# EAGLE board robit_simgosterge_v1 (EAGLE 6.5.0)
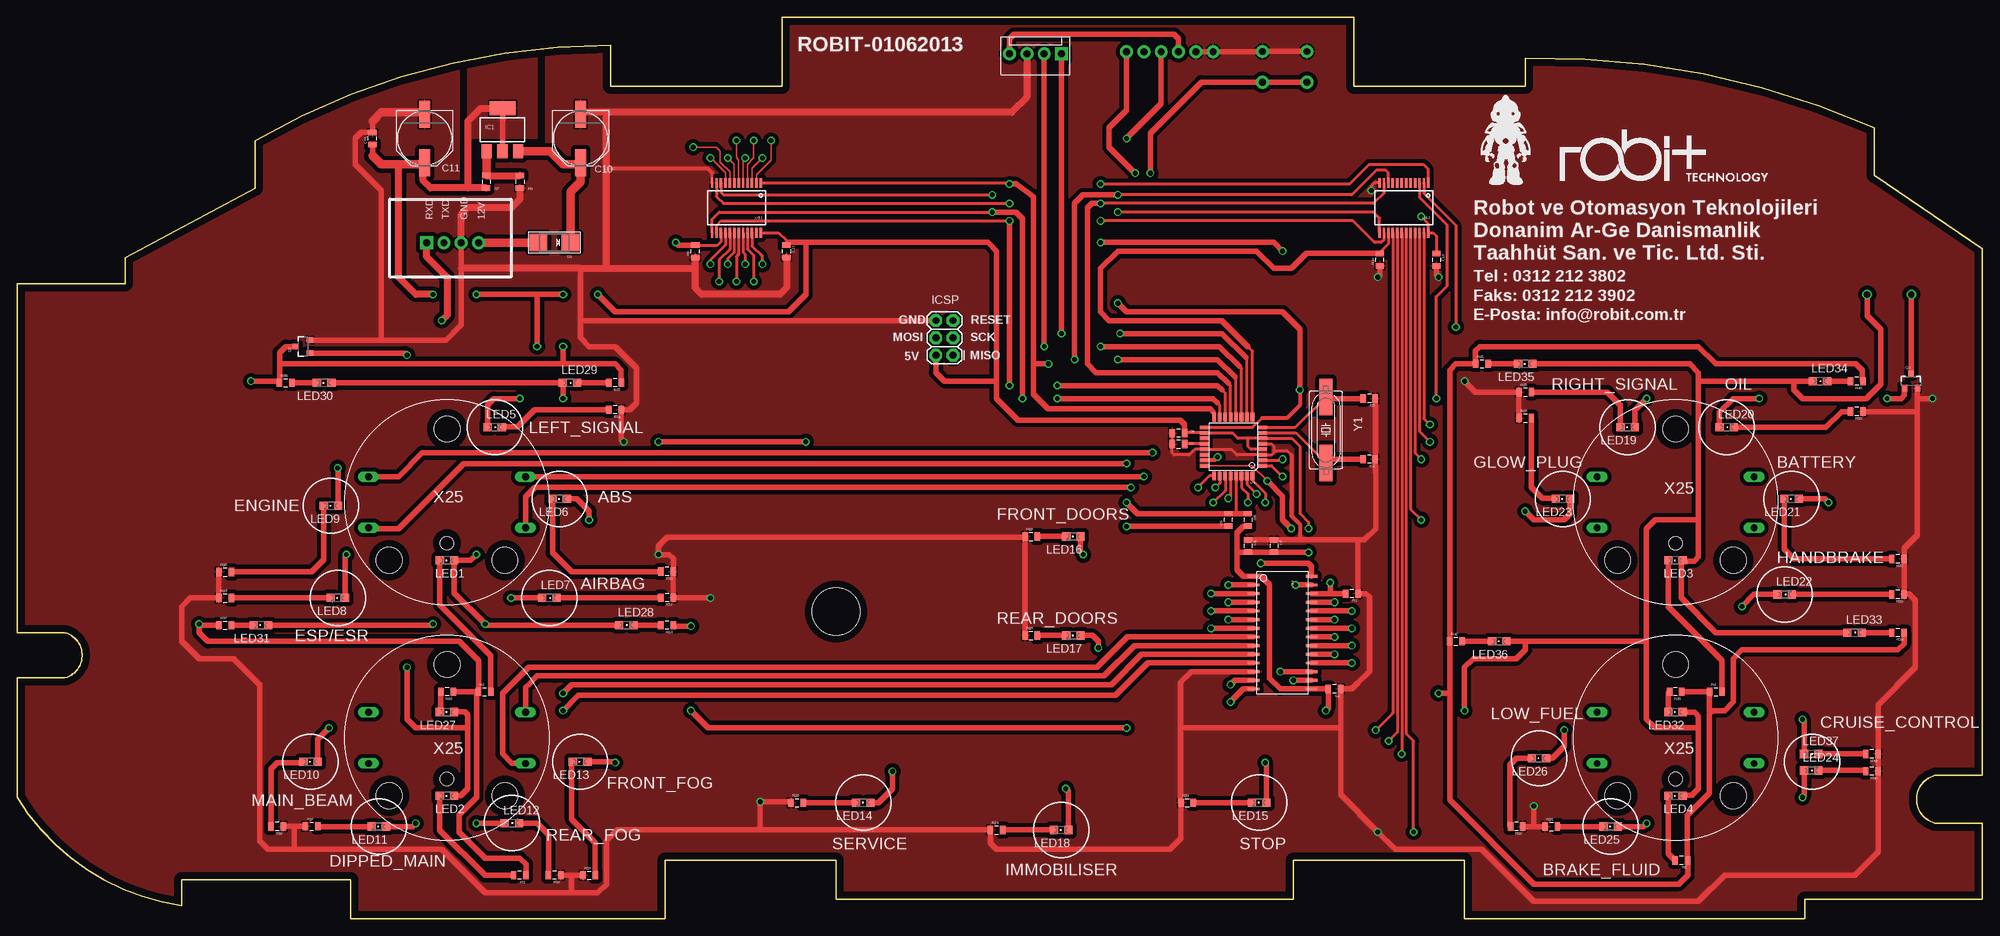
[diagram p0: board, top side]
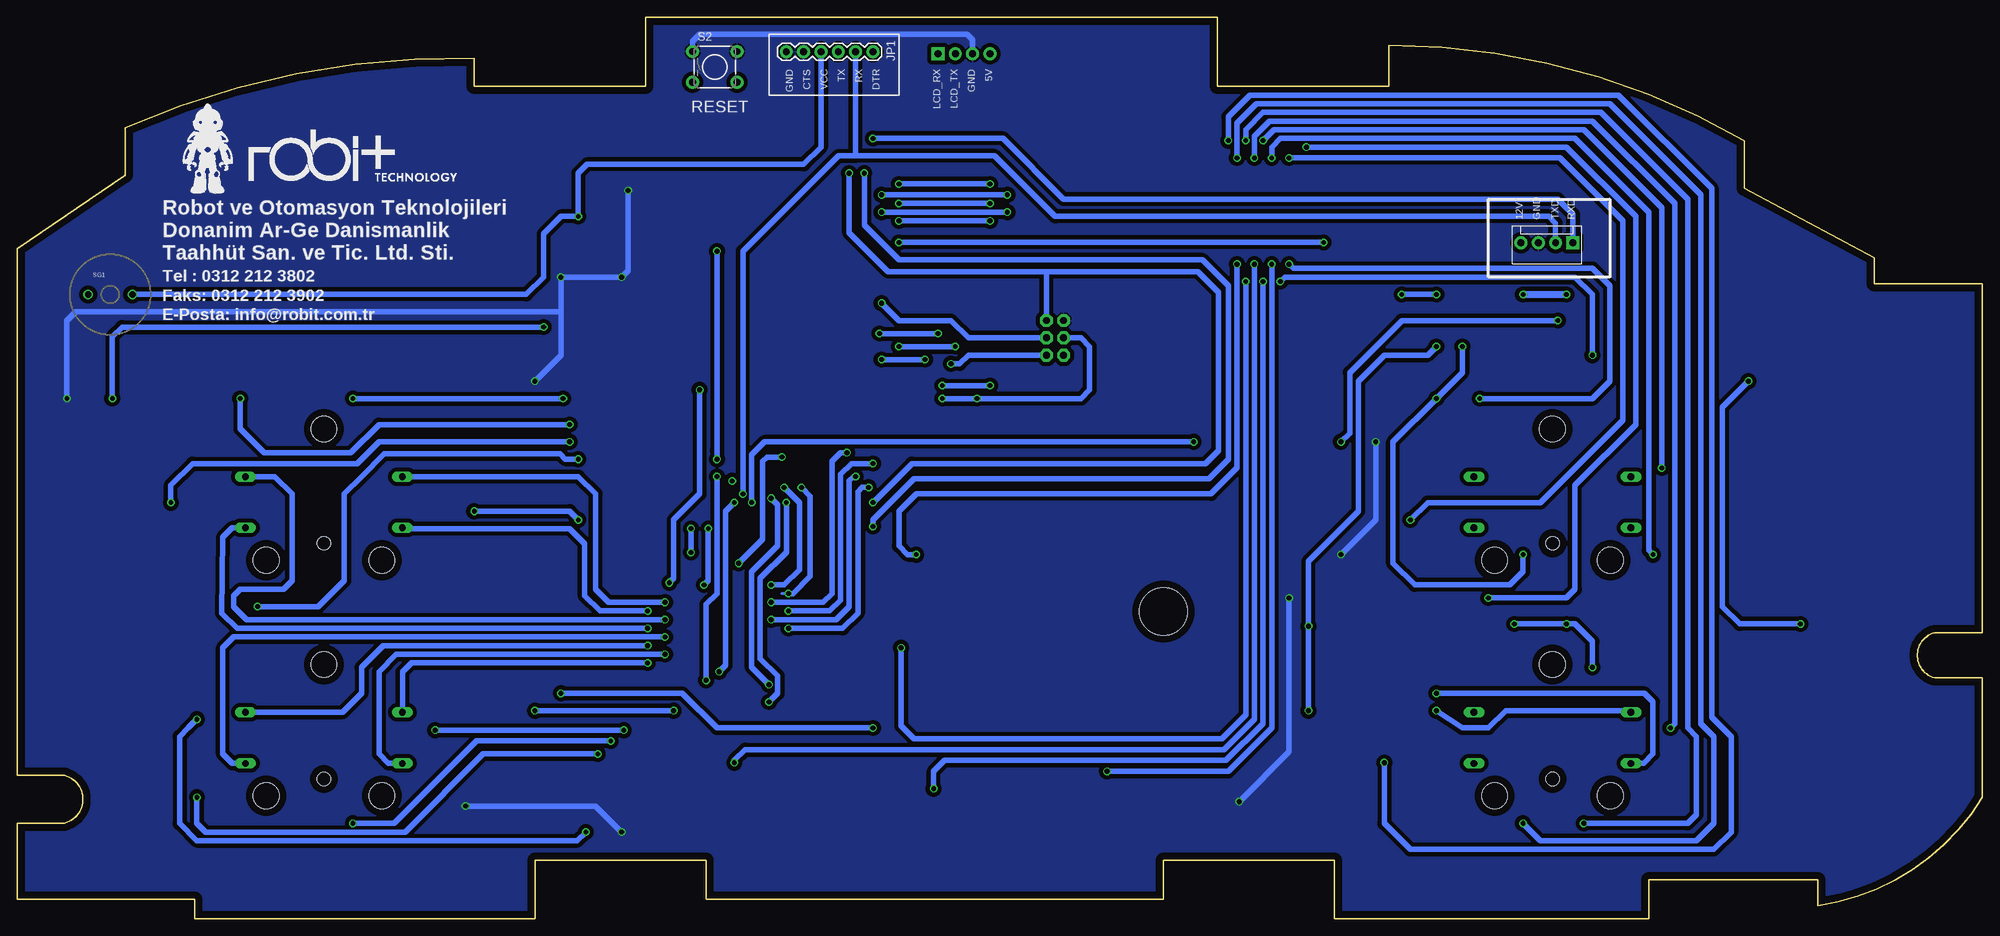
[diagram p1: board, bottom side, seen from below]

Size 287.97 x 132.08 mm. Coordinates in mm from the lower left corner, seen from the top.
Outline: 0,35.27 7,35.27 arc150 7,41.91 0,41.91 0,93.03 15.88,93.03 15.88,96.84 34.92,107 34.92,113.98 arc-30 87,127.95 87,121.92 112.08,121.92 112.08,132.08 195.9,132.08 195.9,121.92 220.98,121.92 220.98,126.05 arc-25 272.1,115.89 272.1,108.9 287.97,98.11 287.97,21 281,21 arc150 281,14 287.97,14 287.97,2.86 261.94,2.86 261.94,0 212.09,0 212.09,8.57 187.01,8.57 187.01,2.86 120.02,2.86 120.02,8.57 94.93,8.57 94.93,0 48.9,0 48.9,5.71 24.13,5.71 24.13,1.91 arc-50 0,17.78 0,35.27
Copper layers (1*16): Top 0.035mm / dielectric 1.5mm / Bottom 0.035mm
Design rules "robit": minimum track width 10mil, minimum drill 24mil, track to track 8mil, track to pad 8mil, pad to pad 8mil, via to via 8mil, smd to smd 8mil, copper to edge 40mil, drill to drill 8mil, minimum pad ring 10mil, minimum via ring 8mil, stop-mask expansion 4mil, vias tented up to drill 0mil, thermal gap 10mil
Holes 7 mm at 120,45

## Footprints (pad centres in the part's own frame; a part is rotated, then mirrored left to right if it is on the bottom)
C0805 = smd 0.8 x 1.2: 1 -0.9,0; 2 0.9,0
PANASONIC_F = smd 4 x 1.6: + 3.55,0; - -3.55,0
SMADIODE = smd 2.54 x 2.54: A 2.349,0; C -2.349,0
SOT223 = smd 1.5 x 2: 1 -2.3,-3.15; 2 0,-3.15; 3 2.3,-3.15 | smd 3.8 x 2: 4 0,3.15
2X3 = drill 1.016 pad 1.88 octagon: 1 0,0; 2 0,2.54; 3 2.54,0; 4 2.54,2.54; 5 5.08,0; 6 5.08,2.54
1X06 = drill 1.016 pad 1.88: 1 0,0; 2 2.54,0; 3 5.08,0; 4 7.62,0; 5 10.16,0; 6 12.7,0
MOLEX-1X4 = drill 1.016 pad 1.88 square: 1 0,0 | drill 1.016 pad 1.88: 2 2.54,0; 3 5.08,0; 4 7.62,0
CHIPLED_0805 = smd 1.2 x 1.2: A 0,-1.05; C 0,1.05
X25_STEPPER_MOTOR = drill 1 long: P$1 -11.5,3.75; P$2 -11.5,-3.75; P$3 11.5,-3.75; P$4 11.5,3.75 | hole 3.8: 0,-10.75; -8.485,8.485; 8.485,8.485 | hole 2: 0,6
SOT23-3 = smd 0.8 x 0.9: 1 -0.95,-1; 2 0.95,-1; 3 0,1.1
0805 = smd 0.8 x 1.2: 1 -0.9,0; 2 0.9,0
R0805 = smd 0.8 x 1.2: 1 -0.9,0; 2 0.9,0
TACTILE-PTH = drill 1.016 pad 1.88: 1 -3.251,2.261; 2 3.251,2.261; 3 -3.251,-2.261; 4 3.251,-2.261
BUZZER-12MM-NS = drill 0.9: + 3.25,0; - -3.25,0
TQFP32-08 = smd 1.27 x 0.559: 1 -4.293,2.8; 2 -4.293,2; 3 -4.293,1.2; 4 -4.293,0.4; 5 -4.293,-0.4; 6 -4.293,-1.2; 7 -4.293,-2; 8 -4.293,-2.8; 17 4.293,-2.8; 18 4.293,-2; 19 4.293,-1.2; 20 4.293,-0.4; 21 4.293,0.4; 22 4.293,1.2; 23 4.293,2; 24 4.293,2.8 | smd 0.559 x 1.27: 9 -2.8,-4.293; 10 -2,-4.293; 11 -1.2,-4.293; 12 -0.4,-4.293; 13 0.4,-4.293; 14 1.2,-4.293; 15 2,-4.293; 16 2.8,-4.293; 25 2.8,4.293; 26 2,4.293; 27 1.2,4.293; 28 0.4,4.293; 29 -0.4,4.293; 30 -1.2,4.293; 31 -2,4.293; 32 -2.8,4.293
SSOP24 = smd 0.348 x 1.397: 1 -3.575,-3.656; 2 -2.925,-3.656; 3 -2.275,-3.656; 4 -1.625,-3.656; 5 -0.975,-3.656; 6 -0.325,-3.656; 7 0.325,-3.656; 8 0.975,-3.656; 9 1.625,-3.656; 10 2.275,-3.656; 11 2.925,-3.656; 12 3.575,-3.656; 13 3.575,3.656; 14 2.925,3.656; 15 2.275,3.656; 16 1.625,3.656; 17 0.975,3.656; 18 0.325,3.656; 19 -0.325,3.656; 20 -0.975,3.656; 21 -1.625,3.656; 22 -2.275,3.656; 23 -2.925,3.656; 24 -3.575,3.656
SOL-28 = smd 0.406 x 1.676: 1 -8.255,-4.25; 2 -6.985,-4.25; 3 -5.715,-4.25; 4 -4.445,-4.25; 5 -3.175,-4.25; 6 -1.905,-4.25; 7 -0.635,-4.25; 8 0.635,-4.25; 9 1.905,-4.25; 10 3.175,-4.25; 11 4.445,-4.25; 12 5.715,-4.25; 13 6.985,-4.25; 14 8.255,-4.25; 15 8.255,4.25; 16 6.985,4.25; 17 5.715,4.25; 18 4.445,4.25; 19 3.175,4.25; 20 1.905,4.25; 21 0.635,4.25; 22 -0.635,4.25; 23 -1.905,4.25; 24 -3.175,4.25; 25 -4.445,4.25; 26 -5.715,4.25; 27 -6.985,4.25; 28 -8.255,4.25
HC49UP = smd 5.334 x 1.93: 1 -4.826,0; 2 4.826,0

## Placement (x,y rotation side)
C1  100 N  [C0805]  180.34,54.61 270 top
C2  100 N  [C0805]  193.04,33.66 180 top
C3  22 uF  [C0805]  184.15,54.61 270 top
C4  22 pF  [C0805]  198.12,67.31 180 top
C5  22 pF  [C0805]  198.12,76.2 180 top
C6  100 nF  [C0805]  177.48,58.42 90 top
C7  100 nF  [C0805]  170.18,69.53 0 top
C8  100 nF  [C0805]  170.18,71.12 180 top
C10  100 uF  [PANASONIC_F]  82.55,114.3 270 top
C11  100 uF  [PANASONIC_F]  59.69,114.3 270 top
C12  100 nF  [C0805]  52.07,114.3 90 top
C13  100 n  [C0805]  112.71,97.79 270 top
C14  100 n  [C0805]  207.96,96.52 270 top
D1  1N4007  [SMADIODE]  78.74,99.06 180 top
IC1  LM317MBSTT3  [SOT223]  71.12,115.57 0 top
ICSP  [2X3]  137.16,82.55 90 top
JP1  [1X06]  162.56,127 180 bottom
JP2  [MOLEX-1X4]  60,99 180 bottom
JP3  [MOLEX-1X4]  153.03,126.68 180 top
LED1  [CHIPLED_0805]  63,52.5 90 top
LED2  [CHIPLED_0805]  63,18 90 top
LED3  [CHIPLED_0805]  243,52.5 90 top
LED4  [CHIPLED_0805]  243,18 90 top
LED5  [CHIPLED_0805]  70,72 270 top
LED6  [CHIPLED_0805]  79.5,61.5 90 top
LED7  [CHIPLED_0805]  78,47 270 top
LED8  [CHIPLED_0805]  47,47 90 top
LED9  [CHIPLED_0805]  46,60.5 90 top
LED10  [CHIPLED_0805]  43,23 90 top
LED11  [CHIPLED_0805]  53,13.5 90 top
LED12  [CHIPLED_0805]  72.5,14 270 top
LED13  [CHIPLED_0805]  82.5,23 90 top
LED14  [CHIPLED_0805]  124,17 90 top
LED15  [CHIPLED_0805]  182,17 90 top
LED16  [CHIPLED_0805]  154.77,56 90 top
LED17  [CHIPLED_0805]  154.77,41.5 90 top
LED18  [CHIPLED_0805]  153,13 90 top
LED19  [CHIPLED_0805]  236,72 90 top
LED20  [CHIPLED_0805]  250.5,72 270 top
LED21  [CHIPLED_0805]  260,61.5 90 top
LED22  [CHIPLED_0805]  259,47.5 270 top
LED23  [CHIPLED_0805]  226.5,61.5 90 top
LED24  [CHIPLED_0805]  262.89,21.72 270 top
LED25  [CHIPLED_0805]  233.5,13.5 90 top
LED26  [CHIPLED_0805]  223,23.5 90 top
LED27  [CHIPLED_0805]  63,30.27 90 top
LED28  [CHIPLED_0805]  89.27,43 270 top
LED29  [CHIPLED_0805]  81,78.5 270 top
LED30  [CHIPLED_0805]  45,78.5 90 top
LED31  [CHIPLED_0805]  35.73,43 90 top
LED32  [CHIPLED_0805]  243,30.27 90 top
LED33  [CHIPLED_0805]  269.24,41.91 270 top
LED34  [CHIPLED_0805]  264.16,78.74 270 top
LED35  [CHIPLED_0805]  220.98,81.28 90 top
LED36  [CHIPLED_0805]  217.17,40.64 90 top
LED37  [CHIPLED_0805]  262.89,24.13 270 top
M1  JUKEN_SWISS_X25_STEPPER_MOTOR  [X25_STEPPER_MOTOR]  63,61 180 top
M2  JUKEN_SWISS_X25_STEPPER_MOTOR  [X25_STEPPER_MOTOR]  243,61 180 top
M3  JUKEN_SWISS_X25_STEPPER_MOTOR  [X25_STEPPER_MOTOR]  243,26.5 180 top
M4  JUKEN_SWISS_X25_STEPPER_MOTOR  [X25_STEPPER_MOTOR]  63,26.5 180 top
Q1  BC817  [SOT23-3]  41.91,83.82 90 top
Q2  BC817  [SOT23-3]  277.5,78.74 0 top
R1  10 K  [0805]  195.58,47.62 180 top
R2  330  [0805]  68.5,33.23 0 top
R3  330  [0805]  73.66,6.36 180 top
R4  330  [0805]  248.92,33.23 0 top
R5  330  [0805]  243.84,8.52 180 top
R6  10 K  [R0805]  180.34,58.42 270 top
R7  330  [R0805]  68.74,107.95 270 top
R8  1 K  [R0805]  73.66,107.95 270 top
R9  10 K  [R0805]  99.38,97.79 90 top
R10  10 K  [R0805]  199.71,96.52 90 top
R11  330  [0805]  87.63,74.54 180 top
R12  330  [0805]  95.25,50.85 180 top
R13  330  [0805]  95.25,47.04 180 top
R14  330  [0805]  30.48,46.99 0 top
R15  330  [0805]  30.48,50.8 0 top
R16  330  [0805]  38.1,13.5 180 top
R17  330  [0805]  43.18,13.55 0 top
R18  330  [0805]  78.77,6.38 180 top
R19  330  [0805]  83.82,6.35 0 top
R20  330  [0805]  114.3,17 0 top
R21  330  [0805]  171.45,17 0 top
R22  330  [0805]  148.59,56 0 top
R23  330  [0805]  148.59,41.5 0 top
R24  330  [0805]  143.51,13 0 top
R25  330  [0805]  220.98,77.15 0 top
R26  330  [0805]  269.56,74.3 180 top
R27  330  [0805]  275.59,52.7 180 top
R28  330  [0805]  275.59,47.5 180 top
R29  330  [0805]  220.98,73.34 0 top
R30  330  [0805]  271.78,21.59 180 top
R31  330  [0805]  224.79,13.5 0 top
R32  330  [0805]  219.71,13.5 180 top
R33  330  [0805]  63,33.23 180 top
R34  330  [0805]  95.25,43 180 top
R35  330  [0805]  87.63,78.5 180 top
R36  330  [0805]  39.37,78.5 0 top
R37  330  [0805]  30.48,43 0 top
R38  330  [0805]  243,33.23 180 top
R39  330  [0805]  275.59,41.91 180 top
R40  330  [0805]  269.56,78.74 180 top
R41  330  [0805]  214.63,81.28 0 top
R42  330  [0805]  210.82,40.64 0 top
R43  330  [0805]  271.78,24.13 180 top
S2  [TACTILE-PTH]  185.74,124.78 0 bottom
SG1  BUZZERNS  [BUZZER-12MM-NS]  274.32,91.44 0 bottom
U1  ATMEGA328P  [TQFP32-08]  178.22,69.16 180 top
U$1  MUX-74HC4067SMD  [SSOP24]  105.41,104.14 180 top
U$2  MUX-74HC4067SMD  [SSOP24]  203.2,104.14 180 top
U$3  [ROBIT_ROBOT_BP]  257.81,106.68 0 top
U$4  [ROBIT_ROBOT]  213.36,106.68 0 top
U$5  [ROBIT_LOGO]  226.06,107.95 0 top
U$6  AX1201728SG-X25_DRIVER  [SOL-28]  185.42,41.91 270 top
U$7  [ROBIT_LOGO]  254,107.95 0 bottom
Y1  16 MHz  [HC49UP]  191.77,71.6 270 top

## Library data of the parts
C1-C3 C13 C14 = SparkFun-Capacitors
C4-C8 C12 R6-R10 = SparkFun-Passives
C10 C11 D1 = adafruit
IC1 = v-reg
ICSP JP1-JP3 = SparkFun-Connectors
LED1-LED37 = led
M1-M4 U$3-U$7 = robit_teknoloji
Q1 Q2 = SparkFun-DiscreteSemi
R1-R5 R11-R43 = SparkFun-Resistors
S2 SG1 = SparkFun-Electromechanical
U1 = SparkFun-DigitalIC; PROD_ID: IC-09069
U$1 U$2 = SparkFun-AnalogIC
Y1 = SparkFun-FreqCtrl

## Nets
5V: C1.2 C2.2 C3.2 C8.1 C11.+ C12.1 C13.1 C14.1 IC1.4 ICSP.2 JP1.4 JP3.4 LED1.A LED2.A LED3.A LED4.A LED27.A LED28.A LED29.A LED30.A LED31.A LED32.A LED33.A LED34.A LED35.A LED36.A R6.2 R7.2 SG1.+ U1.4 U1.6 U1.18 U$1.24 U$2.24 U$6.1 U$6.15
12V: D1.A JP2.4
!RESET: ICSP.3 R1.2 U1.17 U$6.26
ABS_LIGHT: LED6.A U$1.9
BATTERY_CHARGE: LED21.A U$2.22
BRAKE_FLUID_LIGHT: LED25.A U$2.17
BUZZER_WARNING: Q2.1 U$2.2
CHECK_ENGINE: LED9.A U$1.6
CRUISE_CONTROL1: LED24.A U$2.18
CRUISE_CONTROL2: LED37.A U$2.19
DIPPED_BEAM_LIGHT: LED11.A U$1.4
DIRA: U1.24 U$6.27
DIRB: U1.26 U$6.2
DIRC: U1.28 U$6.13
DIRD: U1.1 U$6.16
DRIVER_AIRBAG: LED7.A U$1.8
DTR: C6.1 JP1.1
EN1: R9.2 U1.2 U$1.15
EN2: R10.2 U1.9 U$2.15
ESP/ASR_LIGHT: LED8.A U$1.7
FA: U1.23 U$6.28
FB: U1.25 U$6.3
FC: U1.27 U$6.14
FD: U1.32 U$6.17
FRONT_DOORS_OPEN: LED16.A U$1.22
FRONT_FOG_LIGHT: LED13.A U$1.2
GLOW_PLUG_LIGHT: LED23.A U$2.20
GND: C1.1 C2.1 C3.1 C4.1 C5.1 C7.1 C8.2 C10.- C11.- C12.2 C13.2 C14.2 ICSP.6 JP1.5 JP1.6 JP2.3 JP3.3 Q1.2 Q2.2 R1.1 R8.2 R9.1 R10.1 R11.1 R12.1 R13.1 R14.1 R15.1 R16.1 R17.1 R18.1 R19.1 R20.1 R21.1 R22.1 R23.1 R24.1 R25.1 R26.1 R27.1 R28.1 R29.1 R30.1 R31.1 R32.1 R43.1 S2.1 S2.2 U1.3 U1.5 U1.21 U$1.12 U$2.12 U$6.12
HANDBRAKE_LIGHT: LED22.A U$2.21
IMMOBILISER_LIGHT: LED18.A U$1.19
LCD_RX: JP3.1 U1.10
LCD_TX: JP3.2 U1.11
LEFT_SIGNAL: LED5.A U$1.16
LOW_FUEL_LIGHT: LED26.A U$2.16
MAIN_BEAM_LIGHT: LED10.A U$1.5
MUX_INPUT: ICSP.1 U1.16 U$1.1 U$2.1
N$1: C4.2 U1.7 Y1.2
N$2: LED1.C R2.2
N$3: C5.2 U1.8 Y1.1
N$4: LED2.C R3.2
N$5: C10.+ D1.C IC1.3
N$6: LED3.C R4.2
N$8: LED4.C R5.2
N$9: C7.2 U1.20
N$10: IC1.1 R7.1 R8.1
N$11: LED5.C R11.2
N$12: LED6.C R12.2
N$13: LED7.C R13.2
N$14: LED8.C R14.2
N$15: LED9.C R15.2
N$16: LED10.C R16.2
N$17: LED11.C R17.2
N$18: LED12.C R18.2
N$19: LED37.C R43.2
N$20: LED13.C R19.2
N$21: LED14.C R20.2
N$22: LED15.C R21.2
N$23: LED16.C R22.2
N$24: LED17.C R23.2
N$25: LED18.C R24.2
N$26: LED19.C R25.2
N$27: LED20.C R26.2
N$28: LED21.C R27.2
N$30: LED22.C R28.2
N$31: LED23.C R29.2
N$32: LED24.C R30.2
N$33: LED25.C R31.2
N$34: LED26.C R32.2
N$35: LED27.C R33.2
N$36: LED28.C R34.2
N$37: LED29.C R35.2
N$38: LED30.C R36.2
N$39: LED31.C R37.2
N$41: Q1.3 R2.1 R3.1 R4.1 R5.1 R33.1 R34.1 R35.1 R36.1 R37.1 R38.1 R39.1 R40.1 R41.1 R42.1
N$42: LED32.C R38.2
N$43: LED33.C R39.2
N$44: LED34.C R40.2
N$45: LED35.C R41.2
N$46: LED36.C R42.2
N$48: Q2.3 SG1.-
OIL_WARNING_LIGHT: LED20.A U$2.23
OUT1A: M1.P$1 U$6.7
OUT1B: M2.P$1 U$6.22
OUT1C: M3.P$1 U$6.21
OUT1D: M4.P$1 U$6.8
OUT2A: M1.P$2 U$6.6
OUT2B: M2.P$2 U$6.23
OUT2C: M3.P$2 U$6.20
OUT2D: M4.P$2 U$6.9
OUT3A: M1.P$3 U$6.4
OUT3B: M2.P$3 U$6.25
OUT3C: M3.P$3 U$6.18
OUT3D: M4.P$3 U$6.11
OUT4A: M1.P$4 U$6.5
OUT4B: M2.P$4 U$6.24
OUT4C: M3.P$4 U$6.19
OUT4D: M4.P$4 U$6.10
PANEL_BACKLIGHT: Q1.1 U$1.17
REAR_DOORS_OPEN: LED17.A U$1.21
REAR_FOG_LIGHT: LED12.A U$1.3
RESET: C6.2 ICSP.5 R6.1 S2.3 S2.4 U1.29
RIGHT_SIGNAL: LED19.A U$2.3
RXD: JP1.3 JP2.1 U1.30
S0: U1.12 U$1.10 U$2.10
S1: U1.13 U$1.11 U$2.11
S2: U1.14 U$1.14 U$2.14
S3: ICSP.4 U1.15 U$1.13 U$2.13
SERVICE_WARNING: LED14.A U$1.18
STOP_WARNING: LED15.A U$1.20
TXD: JP1.2 JP2.2 U1.31

## Tracks (layer width: path | path; a pad name or v marks a point on that pad's centre or on a via)
5V  (via drill 0.7)
  Top 0.254: C13.1 112.71,98.74
  Top 0.406: C8.1 171.12,71.16 U1.18 178.08,71.16 178.88,70.36 180.34,70.36 | C14.1 207.96,100.01 207.49,100.48 U$2.24 206.78,101.83 v205.74,102.87 | 180.34,70.36 U1.6 186.81,70.36 187.96,69.22 187.96,59.37 189.23,58.1 v189.23,57.15 | U1.4 180.79,68.76 180.34,69.22 180.34,70.36 | 112.71,98.74 112.71,99.38 111.61,100.48 U$1.24 | 180.29,57.47 R6.2 | 184.2,53.66 C3.2 | 178.81,53.71 178.75,53.66
  Top 0.813: LED2.A 64.99,18 66.04,19.05 66.04,27.94 | LED30.A LED29.A 80.01,78.44 v80.01,76.2 | C12.1 52.07,111.76 | 59.43,110.49 C11.+ | C3.2 C1.2 178.81,53.71 | LED28.A 68.76,43 v68.58,43.18 64.05,47.71 LED1.A 66.47,52.5 v67.31,53.34 | v57.15,36.83 57.15,29.21 58.42,27.94 66.04,27.94 | LED4.A 244.15,18.1 245.43,18.1 246.38,19.05 246.38,27.94 | LED36.A 220.98,40.64 | 220.98,40.64 238.76,40.64 | LED33.A 248.92,41.91 243.84,46.99 243.84,52.29 LED3.A 244.16,52.39 245.75,52.39 246.38,53.02 246.38,58.42 | 238.76,40.64 238.76,29.21 240.03,27.94 246.38,27.94 | 238.76,40.64 238.76,57.15 240.03,58.42 246.38,58.42 | LED34.A 260.35,78.74 | 260.35,78.74 246.38,78.74 | 246.38,78.74 246.38,80.01 245.11,81.28 LED35.A | 246.38,78.74 246.38,58.42 | 76.2,91.44 v76.2,83.82 | 180.29,57.47 179.71,57.47 178.75,56.52 178.75,53.66 178.75,51.12 179.71,50.16 U$6.1 182.25,50.16 183.51,48.9 183.51,35.24 185.1,33.66 U$6.15 C2.2 192.14,30.85 v191.77,30.48 | v189.23,53.66 184.2,53.66 | C8.1 171.08,72.44 170.5,73.03 146.69,73.03 143.51,76.2 143.51,78.74 | LED31.A 60.78,43 v60.96,43.18 | SG1.+ 271.07,88.34 273.05,86.36 273.05,78.26 270.99,76.2 261.62,76.2 260.35,77.47 260.35,78.74 | 71.12,112.39 IC1.4 71.12,118.75 | v80.01,91.44 76.2,91.44 | 76.2,91.44 v67.31,91.44 | JP3.4 145.41,128.91 146.05,129.54 169.54,129.54 170.18,128.91 JP1.4 | 143.51,78.74 143.51,97.79 142.24,99.06 115.57,99.06 | 115.57,99.06 113.08,99.06 C13.1 | v212.09,30.48 212.09,36.83 213.36,38.1 219.71,38.1 220.98,39.37 220.98,40.64 | LED32.A 245.8,30.27 246.38,29.69 246.38,27.94 | 66.04,27.94 66.04,29.84 65.56,30.32 64.1,30.32 LED27.A | v85.09,91.44 87.63,88.9 113.03,88.9 115.57,91.44 115.57,99.06
  Top 0.813: ICSP.2 134.62,80.01 135.89,78.74 143.51,78.74
  Top 1.016: R7.2 66.04,107.05 | 66.04,107.05 60.59,107.05 59.43,108.21 59.43,110.49 | 66.04,107.05 66.04,116.84 67.92,118.72 IC1.4 | v60.96,91.44 58.42,91.44 55.88,93.98 55.88,110.49
  Top 1.27: 52.07,111.76 53.34,110.49 55.88,110.49 59.43,110.49
  Bottom 0.813: v68.58,43.18 v60.96,43.18 59.69,43.18 57.15,40.64 v57.15,36.83 | v67.31,53.34 67.31,50.8 69.22,48.9 83.19,48.9 86.36,52.07 86.36,69.85 v80.01,76.2 76.2,80.01 v76.2,83.82 | 271.14,91.52 SG1.+ 213.36,91.44 210.82,93.98 210.82,100.33 208.28,102.87 v205.74,102.87 205.74,109.22 204.47,110.49 172.72,110.49 170.18,113.03 JP1.4 | v85.09,91.44 v80.01,91.44 | v191.77,30.48 v212.09,30.48 | v189.23,57.15 v189.23,53.66
  Bottom 1.016: v67.31,91.44 v60.96,91.44
  pour Top (isolate 0.61): 66.04,114.3 76.2,114.3 76.2,132.08 66.04,132.08
12V
  Top 0.813: 76.33,99 D1.A
  Top 1.27: JP2.4 76.33,99
!RESET  (via drill 0.7)
  Top 0.406: U1.17 181.02,71.96 182.4,73.34
  Top 0.61: v187.96,77.47 187.96,75.25 186.06,73.34 182.4,73.34
  Top 0.813: U$6.26 192.41,47.62 | 192.41,47.62 R1.2 | v192.41,49.21 192.41,47.62 | v161.29,90.17 162.56,88.9 185.42,88.9 187.96,86.36 v187.96,77.47
  Bottom 0.813: v187.96,77.47 187.96,62.23 191.77,58.42 191.77,49.85 v192.41,49.21 | ICSP.3 148.59,85.09 151.13,87.63 158.75,87.63 v161.29,90.17
ABS_LIGHT  (via drill 0.7)
  Top 0.254: U$1.9 103.78,109.26 v101.6,111.44
  Top 0.813: LED6.A 82.01,61.5 83.82,59.69 v83.82,58.42
  Bottom 0.813: v101.6,111.44 61.91,111.44 52.7,102.23 52.7,73.03 64.77,60.96 81.28,60.96 v83.82,58.42
BATTERY_CHARGE  (via drill 0.7)
  Top 0.406: U$2.22 205.47,71.39 v207.01,69.85
  Top 0.813: LED21.A 264.89,61.5 v265.43,60.96
  Bottom 0.813: v265.43,60.96 265.43,63.5 262.25,66.67 238.12,66.67 234.95,69.85 v207.01,69.85
BRAKE_FLUID_LIGHT  (via drill 0.7)
  Top 0.406: U$2.17 202.22,27.28 v200.98,26.04
  Top 0.813: LED25.A 238.29,13.5 v238.76,13.97
  Bottom 0.813: v238.76,13.97 232.73,13.97 220.66,26.04 v200.98,26.04
BUZZER_WARNING  (via drill 0.7)
  Top 0.406: U$2.2 206.12,106.3 210.82,101.6 v210.82,86.68
  Top 0.813: Q2.1 276.55,76.68 276.07,76.2 v274,76.2
  Bottom 0.813: v210.82,86.68 272.57,86.68 274,85.25 v274,76.2
CHECK_ENGINE  (via drill 0.7)
  Top 0.254: U$1.6 105.73,111.12 105.41,111.44 v105.41,113.98
  Top 0.813: LED9.A 47.05,65.98 v46.99,66.04
  Bottom 0.813: v105.41,113.98 103.82,115.57 58.42,115.57 46.99,104.14 v46.99,66.04
CRUISE_CONTROL1  (via drill 0.7)
  Top 0.406: U$2.18 v202.88,24.14 v202.88,24.13
  Top 0.813: LED24.A 261.84,18 v261.62,17.78
  Bottom 0.813: v261.62,17.78 261.62,13.97 260.35,12.7 231.14,12.7 219.71,24.13 v202.88,24.13
CRUISE_CONTROL2  (via drill 0.7)
  Top 0.406: v204.63,12.7 204.63,26.04 203.53,27.14 U$2.19
  Top 0.813: LED37.A 261.84,28.99 v261.62,29.21
  Bottom 0.813: v261.62,29.21 262.89,27.94 264.16,26.67 264.16,13.97 261.62,11.43 205.9,11.43 v204.63,12.7
DIPPED_BEAM_LIGHT  (via drill 0.7)
  Top 0.254: U$1.4 107.03,110.53 107.95,111.44 v107.95,113.98
  Top 0.813: LED11.A 57.95,13.5 v58.42,13.97
  Bottom 0.813: v107.95,113.98 107.95,115.57 105.41,118.11 55.88,118.11 43.18,105.41 43.18,27.94 41.91,26.67 41.91,15.24 43.18,13.97 v58.42,13.97
DIRA  (via drill 0.7)
  Top 0.254: U1.24 180.97,66.36 v183.2,64.14
  Top 0.813: v187.32,48.9 U$6.27 | v186.69,57.15 185.42,58.42 185.42,61.91 v183.2,64.14
  Bottom 0.813: v186.69,57.15 186.69,49.53 v187.32,48.9
DIRB  (via drill 0.7)
  Top 0.406: U1.26 176.22,63.83 v175.58,63.18
  Top 0.813: U$6.2 v177.48,48.9
  Bottom 0.813: v177.48,48.9 175.58,48.9 173.35,51.12 173.35,60.96 v175.58,63.18
DIRC  (via drill 0.7)
  Top 0.406: U1.28 177.82,61.93 v177.48,61.59
  Top 0.813: U$6.13 178.44,34.92 v177.8,34.29
  Bottom 0.813: v177.8,34.29 180.34,36.83 180.34,50.8 176.53,54.61 176.53,60.64 v177.48,61.59
DIRD  (via drill 0.7)
  Top 0.406: U1.1 183.83,66.36 v185.42,64.77
  Top 0.813: v187.01,34.92 U$6.16
  Bottom 0.813: v185.42,64.77 185.42,47.62 187.01,46.04 v187.01,34.92
DRIVER_AIRBAG  (via drill 0.7)
  Top 0.254: U$1.8 104.44,109.4 103.03,110.81 103.03,112.39 102.39,113.03 v99.06,113.03
  Top 0.813: LED7.A v72.4,47 v72.39,46.99
  Bottom 0.813: v72.39,46.99 60.96,46.99 59.69,48.26 59.69,63.5 50.8,72.39 50.8,102.87 60.96,113.03 96.84,113.03 v99.06,113.03
DTR  (via drill 0.7)
  Top 0.813: JP1.1 162.56,118.43 160.02,115.89 160.02,113.03 v163.83,109.22 | C6.1 162.93,57.52 v162.56,57.47
  Bottom 0.813: v163.83,109.22 163.83,101.6 158.75,96.52 114.3,96.52 110.49,92.71 110.49,67.31 113.35,64.45 156.53,64.45 162.56,58.42 v162.56,57.47
EN1  (via drill 0.7)
  Top 0.406: U1.2 185.27,67.16 v185.42,67.31 | U$1.15 103.14,99.17 102.55,98.58 99.48,98.58 R9.2
  Top 0.813: R9.2 96.89,98.69 v96.52,99.06 | v158.75,99.06 184.15,99.06 v185.42,97.79
  Bottom 0.813: v96.52,99.06 v158.75,99.06 | v185.42,97.79 185.42,68.58 v185.42,67.31
EN2
  Top 0.406: U$2.15 200.93,98.85 199.71,97.63 R10.2 | U1.9 181.02,83.14 180.34,83.82
  Top 0.813: R10.2 199.66,97.47 188.91,97.47 186.69,95.25 184.15,95.25 181.61,97.79 161.29,97.79 158.75,95.25 158.75,88.9 160.02,87.63 176.53,87.63 180.34,83.82
ESP/ASR_LIGHT  (via drill 0.7)
  Top 0.254: U$1.7 105.08,110.5 v104.14,111.44
  Top 0.813: LED8.A 48.05,53.13 v48.26,53.34
  Bottom 0.813: v48.26,53.34 48.9,53.98 48.9,103.5 59.69,114.3 102.87,114.3 104.14,113.03 v104.14,111.44
FA  (via drill 0.7)
  Top 0.61: v175.9,67.63 175.43,67.16 U1.23
  Top 0.813: U$6.28 189.67,51.63 189.23,52.07 v182.25,52.07
  Bottom 0.813: v175.9,67.63 178.12,67.63 178.75,66.99 178.75,55.56 v182.25,52.07
FB  (via drill 0.7)
  Top 0.406: U1.25 174.72,64.87 v173.04,63.18
  Top 0.813: U$6.3 v174.94,47.62
  Bottom 0.406: v174.94,47.62 175.9,47.62
  Bottom 0.813: v173.04,63.18 171.77,61.91 171.77,50.16 174.31,47.62 v174.94,47.62
FC  (via drill 0.7)
  Top 0.406: U1.27 177.02,62.72 v175.26,60.96
  Top 0.813: v177.8,31.75 179.71,33.66 U$6.14
  Bottom 0.813: v177.8,31.75 176.53,33.02 176.53,35.56 179.07,38.1 179.07,49.85 175.26,53.66 v175.26,60.96
FD  (via drill 0.7)
  Top 0.406: U1.32 181.02,64.22 182.88,62.36 v182.88,60.96
  Top 0.813: U$6.17 v185.1,36.2
  Bottom 0.813: v182.88,60.96 184.15,59.69 184.15,37.15 v185.1,36.2
FRONT_DOORS_OPEN  (via drill 0.7)
  Top 0.406: U$1.22 107.69,98.53 109.06,97.16 109.22,97 v109.22,95.89
  Top 0.813: LED16.A 155.82,53.73 v156.21,53.34
  Bottom 0.813: v109.22,95.89 109.22,66.04 113.03,62.23 156.21,62.23 158.75,59.69 158.75,54.61 157.48,53.34 v156.21,53.34
FRONT_FOG_LIGHT  (via drill 0.7)
  Top 0.254: v110.49,113.98 110.49,111.12 108.33,108.97 U$1.2
  Top 0.813: LED13.A 87.49,23 v87.63,22.86
  Bottom 0.813: v87.63,22.86 87.63,13.97 83.82,10.16 39.37,10.16 36.83,12.7 36.83,26.67 39.69,29.53 39.69,107 53.34,120.65 107.31,120.65 110.49,117.47 v110.49,113.98
GLOW_PLUG_LIGHT  (via drill 0.7)
  Top 0.406: U$2.20 204.18,59.98 v205.74,58.42
  Top 0.813: LED23.A 227.55,59.27 226.69,58.42 222.25,58.42 v220.98,59.69
  Bottom 0.813: v220.98,59.69 207.01,59.69 v205.74,58.42
GND  (via drill 0.7)
  Top 0.406: C8.2 C7.1 169.23,69.48 169.23,68.26 169.54,67.94 171.77,67.94 172.58,68.76 U1.21 177.94,68.76 178.74,67.96 U1.3 183.85,67.96 184.15,68.26 184.15,68.58 | 86.51,107.8 86.36,107.95 | U1.5 183.81,69.56 184.15,69.22 184.15,68.58 | 170.5,17.05 R21.1 | 184.15,68.58 186.06,68.58 186.69,67.94 | U$1.12 101.83,109.3 | U$2.12 198.92,107.8 198.44,107.31 v198.44,106.68
  Top 0.61: 186.69,67.94 186.69,59.05 187.96,57.78 187.96,55.51 | 101.83,109.3 101.28,109.86 86.36,109.86
  Top 0.813: R17.1 40.64,13.55 | 40.64,13.55 39,13.55 R16.1 | R18.1 81.28,6.38 | 81.28,6.38 82.89,6.38 R19.1 | 81.28,3.81 68.58,3.81 62.23,10.16 40.64,10.16 | 40.64,10.16 40.64,13.55 | 82.29,118.11 C10.- 82.81,118.11 | 59.43,118.11 C11.- | C1.1 C3.1 187.96,55.51 196.22,55.51 | C5.1 C4.1 199.07,63.45 199.07,57.15 197.43,55.51 196.22,55.51 | Q1.2 53.34,84.77 | 53.34,84.77 62.86,84.77 65.08,86.99 65.08,95.25 JP2.3 | R23.1 R22.1 147.57,55.88 95.25,55.88 93.98,54.61 v93.98,53.34 95.57,53.34 96.2,52.7 96.2,50.9 R12.1 R13.1 101.55,47.04 v101.6,46.99 | 108.57,13 R24.1 142.61,11.06 143.51,10.16 168.91,10.16 170.55,11.8 R21.1 | 40.64,10.16 36.83,10.16 35.56,11.43 35.56,34.29 31.75,38.1 26.67,38.1 24.13,40.64 24.13,45.72 25.4,46.99 R14.1 29.53,47.04 29.53,50.75 R15.1 | v88.9,69.85 88.53,70.22 R11.1 89.78,74.54 90.81,75.56 90.81,80.64 87.63,83.82 83.82,83.82 82.55,85.09 82.55,87.63 | 82.55,95.25 82.55,87.63 | R31.1 R32.1 222.1,13.5 222.25,13.65 v222.25,16.51 | R29.1 R25.1 213.68,77.15 v212.09,78.74 | Q2.2 278.44,76.2 | 278.44,76.2 278.44,74.3 | 278.44,74.3 278.44,56.2 276.49,54.24 R27.1 R28.1 276.62,47.62 277.18,47.62 278.13,46.67 278.13,36.83 272.68,31.38 R43.1 R30.1 272.68,9.79 269.24,6.35 250.19,6.35 246.38,2.54 222.25,2.54 214.63,10.16 201.93,10.16 v199.39,12.7 193.94,18.15 193.94,27.94 | R26.1 278.44,74.3 | R10.1 199.71,94.3 v199.39,93.98 | v208.28,93.98 207.96,94.3 C14.2 | v280.67,76.2 278.44,76.2 | U$6.12 172.09,36.2 170.5,34.61 170.5,27.94 | 170.5,27.94 170.5,17.05 | R20.1 113.25,17.14 v108.9,17.14 108.9,13.34 108.57,13 | S2.1 S2.2 182.45,127 JP1.6 JP1.5 | 81.28,3.81 81.28,6.38 | 81.28,3.81 85.09,3.81 86.36,5.08 86.36,11.43 87.93,13 108.57,13
  Top 0.813: 193.94,27.94 170.5,27.94 | 193.94,27.94 C2.1 195.58,33.66 196.48,34.55 198.12,36.2 198.12,36.83 198.12,47.15 197.64,47.62 R1.1 196.48,55.24 196.22,55.51 | 53.34,84.77 53.34,106.68 49.53,110.49 49.53,114.3 50.43,115.2 C12.2 52.07,116.84 | ICSP.6 82.55,87.63
  Top 1.016: 86.36,95.25 86.36,107.95 86.36,109.86 86.36,118.11 | R8.2 73.66,105.41 72.39,104.14 66.04,104.14 65.08,103.18 JP2.3 | 65.08,95.25 82.55,95.25 86.36,95.25 | JP3.3 147.96,120.33 145.73,118.11 86.36,118.11 | 86.36,118.11 82.81,118.11 | C13.2 112.71,92.39 111.76,91.44 100.33,91.44 99.38,92.39 99.38,95.25 | R9.1 99.38,95.25 | 86.36,95.25 99.38,95.25
  Top 1.27: 52.07,116.84 53.34,118.11 59.43,118.11
  Bottom 0.813: v88.9,69.85 88.9,58.42 v93.98,53.34 | 208.28,88.9 279.4,88.9 280.67,87.63 v280.67,76.2 | v101.6,46.99 101.6,24.45 v108.9,17.14 | v212.09,78.74 208.28,82.55 208.28,88.9 | 208.28,88.9 v208.28,93.98 v199.39,93.98 198.44,94.93 v198.44,106.68 | v222.25,16.51 203.2,16.51 v199.39,12.7 | S2.1 188.99,128.51 187.96,129.54 148.75,129.54 147.96,128.75 JP3.3
  pour Top (isolate 0.61): 0,0 0,132.08 13.97,132.08 64.77,132.08 64.77,113.03 77.47,113.03 77.47,132.08 288.29,132.08 288.29,0
  pour Bottom (isolate 0.61): 0,0 0,132.08 64.77,132.08 64.77,113.03 77.47,113.03 77.47,132.08 288.29,132.08 288.29,0
HANDBRAKE_LIGHT  (via drill 0.7)
  Top 0.406: U$2.21 204.82,68.22 v205.74,67.31
  Top 0.813: LED22.A 254.51,47.5 v252.73,45.72
  Bottom 0.813: v205.74,67.31 207.65,67.31 208.44,68.1 234.16,68.1 237.49,64.77 240.03,62.23 240.03,49.53 242.57,46.99 243.84,45.72 v252.73,45.72
IMMOBILISER_LIGHT  (via drill 0.7)
  Top 0.406: U$1.19 105.73,97.32 105.41,97 v105.41,93.34
  Top 0.813: LED18.A 154.05,18.67 v153.67,19.05
  Bottom 0.813: v153.67,19.05 153.67,21.59 152.08,23.18 110.81,23.18 105.41,28.57 v105.41,93.34
LCD_RX  (via drill 0.7)
  Top 0.406: U1.10 180.22,82.03 180.02,82.23
  Top 0.813: v161.61,85.72 176.53,85.72 180.02,82.23 | v153.03,85.72 JP3.1
  Bottom 0.813: v161.61,85.72 v153.03,85.72
LCD_TX  (via drill 0.7)
  Top 0.406: U1.11 179.42,80.61 179.07,80.96
  Top 0.813: v158.75,83.82 176.21,83.82 179.07,80.96 | v150.5,83.82 JP3.2
  Bottom 0.813: v158.75,83.82 v150.5,83.82
LEFT_SIGNAL  (via drill 0.7)
  Top 0.406: U$1.16 103.78,98.7 101.6,96.52 v101.6,95.89
  Top 0.813: LED5.A 68.95,75.3 69.85,76.2 v73.66,76.2
  Bottom 0.813: v73.66,76.2 57.15,76.2 54.61,78.74 54.61,92.71 57.15,95.25 100.33,95.25 100.97,95.25 v101.6,95.89
LOW_FUEL_LIGHT  (via drill 0.7)
  Top 0.406: U$2.16 201.57,30.12 v199.07,27.62
  Top 0.813: LED26.A 224.16,23.5 224.95,23.5 226.69,25.24 v226.69,27.62
  Bottom 0.813: v226.69,27.62 v199.07,27.62
MAIN_BEAM_LIGHT  (via drill 0.7)
  Top 0.254: U$1.5 106.39,111.15 v106.68,111.44
  Top 0.813: LED10.A 44.05,26.27 v45.72,27.94
  Bottom 0.813: v106.68,111.44 106.68,114.62 104.46,116.84 57.15,116.84 45.09,104.78 45.09,28.57 v45.72,27.94
MUX_INPUT  (via drill 0.7)
  Top 0.406: U$1.1 145.25,107.8 v145.41,107.63 | v158.75,107.63 195.26,107.63 198.12,110.49 206.06,110.49 206.78,109.77 U$2.1 | U1.16 175.42,74.14 175.26,74.3
  Top 0.813: 148.91,81.28 148.91,76.83 151.02,74.72 174.83,74.72 175.26,74.3 | 148.91,81.28 148.91,105.73 146.37,107.63 v145.41,107.63 | v151.13,81.28 148.91,81.28
  Bottom 0.813: v145.41,107.63 v158.75,107.63 | ICSP.1 148.59,82.55 149.86,81.28 v151.13,81.28
N$1
  Top 0.406: U1.7 187.38,71.16 Y1.2
  Top 0.813: C4.2 192.31,67.31 Y1.2
N$2
  Top 0.813: R2.2 69.4,38.55 61.95,46 LED1.C
N$3
  Top 0.406: U1.8 187.31,71.96 Y1.1
  Top 0.813: C5.2 191.99,76.2 Y1.1
N$4
  Top 0.813: LED2.C 61.95,12.98 68.58,6.35 R3.2
N$5
  Top 0.813: 82.55,110.49 C10.+
  Top 1.27: D1.C 81.09,106.49 82.55,107.95 82.55,110.49 80.01,110.49 78.08,112.42 IC1.3
N$6
  Top 0.813: R4.2 249.82,37.84 241.94,45.72 241.94,52.48 LED3.C
N$8
  Top 0.813: LED4.C 241.95,9.51 R5.2
N$9
  Top 0.406: U1.20 171.11,69.56 C7.2
N$10
  Top 0.813: 68.82,109.09 R7.1
  Top 1.016: R7.1 R8.1
  Top 1.27: IC1.1 68.82,109.09
N$11
  Top 0.813: R11.2 75.81,74.54 73.34,72.07 71.12,72.07 LED5.C
N$12
  Top 0.813: LED6.C 78.45,53.63 81.28,50.8 94.3,50.8 R12.2
N$13
  Top 0.813: LED7.C 94.31,47 R13.2
N$14
  Top 0.813: LED8.C R14.2
N$15
  Top 0.813: LED9.C 44.95,52.57 43.18,50.8 R15.2
N$16
  Top 0.813: R16.2 37.2,21.96 38.1,22.86 41.81,22.86 LED10.C
N$17
  Top 0.813: LED11.C 44.08,13.5 R17.2
N$18
  Top 0.813: R18.2 77.87,12.3 76.2,13.97 73.58,13.97 LED12.C
N$19
  Top 0.813: LED37.C R43.2
N$20
  Top 0.813: R19.2 84.72,11.16 81.28,14.61 81.28,22.83 LED13.C
N$21
  Top 0.813: R20.2 LED14.C
N$22
  Top 0.813: R21.2 LED15.C
N$23
  Top 0.813: LED16.C R22.2
N$24
  Top 0.813: LED17.C R23.2
N$25
  Top 0.813: R24.2 LED18.C
N$26
  Top 0.813: LED19.C 234.95,75.25 233.04,77.15 R25.2
N$27
  Top 0.813: LED20.C 265.04,72 267.33,74.3 R26.2
N$28
  Top 0.813: LED21.C 258.95,54.1 260.35,52.7 R27.2
N$30
  Top 0.813: LED22.C R28.2
N$31
  Top 0.813: R29.2 221.88,63.23 223.52,61.59 225.35,61.59 LED23.C
N$32
  Top 0.813: LED24.C 270.75,21.72 R30.2
N$33
  Top 0.813: LED25.C R31.2
N$34
  Top 0.813: LED26.C 219.72,23.5 218.76,22.54 218.76,13.55 R32.2
N$35
  Top 0.813: R33.2 62.1,30.42 LED27.C
N$36
  Top 0.813: R34.2 LED28.C
N$37
  Top 0.813: LED29.C R35.2
N$38
  Top 0.813: R36.2 LED30.C
N$39
  Top 0.813: LED31.C R37.2
N$41  (via drill 0.7)
  Top 0.406: R42.1 209.92,33.39 209.55,33.02
  Top 0.813: 38.47,81.28 R36.1 38.23,78.74 v34.29,78.74 | 38.47,81.28 38.47,82.92 39.37,83.82 Q1.3 | R3.1 74.56,7.99 73.66,8.89 68.58,8.89 64.77,12.7 64.77,15.24 67.31,17.78 67.31,30.48 67.31,32.94 R2.1 R33.1 67.52,33.23 67.63,33.34 67.63,37.78 64.77,40.64 27.94,40.64 26.67,41.91 v26.67,43.18 26.85,43 R37.1 | R35.1 88.53,80.38 87.63,81.28 80.01,81.28 | 80.01,81.28 38.47,81.28 | 270.51,78.74 R40.1 270.35,78.85 270.35,80.33 269.4,81.28 248.92,81.28 246.38,83.82 214.31,83.82 213.68,83.19 213.68,81.33 R41.1 210.82,81.28 209.92,80.38 R42.1 209.92,17.41 222.25,5.08 243.52,5.08 244.79,6.35 244.79,8.47 R5.1 244.74,15.19 247.97,18.41 247.97,30 248.44,30.48 | R38.1 R4.1 247.97,33.18 247.97,30.48 248.44,30.48 | 96.2,42.86 96.15,42.81 R34.1 96.29,42.86 v98.74,42.86 | v80.01,83.82 80.01,81.28 | 209.55,33.02 v208.28,33.02 | v162.56,27.94 101.28,27.94 v98.74,30.48 | R39.1 276.49,40.27 275.59,39.37 252.73,39.37 251.46,38.1 251.46,31.75 250.19,30.48 248.44,30.48
  Bottom 0.813: v26.67,43.18 35.56,43.18 38.1,45.72 38.1,74.93 v34.29,78.74 | v80.01,83.82 81.28,82.55 87.63,82.55 91.44,78.74 91.44,59.69 98.74,52.39 v98.74,42.86 v98.74,30.48 | v208.28,33.02 190.5,33.02 185.42,27.94 v162.56,27.94
N$42
  Top 0.813: LED32.C 241.95,33.08 R38.2
N$43
  Top 0.813: LED33.C R39.2
N$44
  Top 0.813: LED34.C R40.2
N$45
  Top 0.813: R41.2 LED35.C
N$46
  Top 0.813: R42.2 LED36.C
N$48
  Top 0.813: SG1.- 277.57,79.92 Q2.3
OIL_WARNING_LIGHT  (via drill 0.7)
  Top 0.406: U$2.23 206.12,73.28 v207.01,72.39
  Top 0.813: LED20.A 249.45,74.19 251.46,76.2 v255.27,76.2
  Bottom 0.813: v255.27,76.2 255.27,71.75 251.78,68.26 239.08,68.26 234.95,72.39 v207.01,72.39
OUT1A  (via drill 0.7)
  Top 0.813: M1.P$1 74.5,61.8 75.88,63.18 v163.19,63.18 | v174.94,42.55 U$6.7
  Bottom 0.813: v163.19,63.18 164.15,63.18 164.78,62.55 164.78,44.77 167,42.55 v174.94,42.55
OUT1B  (via drill 0.7)
  Top 0.813: v195.58,42.55 U$6.22
  Bottom 0.813: M2.P$1 256.44,57.25 257.81,55.88 257.97,44.77 255.75,42.55 v195.58,42.55
OUT1C  (via drill 0.7)
  Top 0.813: v193.04,41.27 U$6.21
  Bottom 0.813: M3.P$1 256.43,22.75 257.81,24.13 257.81,39.69 256.22,41.27 v193.04,41.27
OUT1D
  Top 0.813: M4.P$1 72.5,22.75 71.12,24.13 71.12,33.02 74.93,36.83 158.24,36.83 161.67,40.26 | 161.67,40.26 162.05,40.64 | U$6.8 162.69,41.27 161.67,40.26
OUT2A  (via drill 0.7)
  Top 0.813: U$6.6 v177.48,43.81 | M1.P$2 165.08,64.75 v165.1,64.77
  Bottom 0.813: v165.1,64.77 165.42,64.77 166.05,64.14 166.05,45.72 167.96,43.81 v177.48,43.81
OUT2B  (via drill 0.7)
  Top 0.813: v193.04,43.81 U$6.23
  Bottom 0.813: v193.04,43.81 254.32,43.81 256.22,45.72 256.22,47.31 255.27,48.26 248.92,48.26 247.65,49.53 247.65,62.23 250.19,64.77 254.48,64.77 M2.P$2
OUT2C  (via drill 0.7)
  Top 0.813: v195.58,40.01 U$6.20
  Bottom 0.813: v195.58,40.01 233.68,40.01 234.31,40.01 237.49,36.83 237.49,33.02 240.03,30.48 240.26,30.25 M3.P$2
OUT2D
  Top 0.813: U$6.9 163.7,40.01 159.26,35.56 78.74,35.56 76.2,35.56 74.93,34.29 74.61,33.97 74.5,33.86 M4.P$2
OUT3A  (via drill 0.7)
  Top 0.813: v166.37,68.26 59.37,68.26 55.88,64.77 51.52,64.77 M1.P$3 | v177.48,46.35 U$6.4
  Bottom 0.813: v166.37,68.26 167.32,68.26 168.59,66.99 168.59,47.62 169.86,46.35 v177.48,46.35
OUT3B  (via drill 0.7)
  Top 0.813: v193.04,46.35 U$6.25
  Bottom 0.813: v193.04,46.35 201.29,46.35 203.2,48.26 203.2,62.23 205.74,64.77 231.48,64.77 M2.P$3
OUT3C  (via drill 0.7)
  Top 0.813: v195.58,37.47 U$6.18
  Bottom 0.813: M3.P$3 231.5,36.15 230.19,37.47 v195.58,37.47
OUT3D  (via drill 0.7)
  Top 0.813: U$6.11 165.74,37.47 160.97,32.7 82.23,32.7 v80.01,30.48
  Bottom 0.813: v80.01,30.48 76.2,27.94 72.39,27.94 69.85,30.48 51.73,30.48 M4.P$3
OUT4A  (via drill 0.7)
  Top 0.813: v162.56,66.67 65.41,66.67 55.88,57.15 51.6,57.15 M1.P$4 | v174.94,45.09 U$6.5
  Bottom 0.813: v162.56,66.67 165.74,66.67 167.32,65.09 167.32,46.67 168.91,45.09 v174.94,45.09
OUT4B  (via drill 0.7)
  Top 0.813: v195.58,45.09 U$6.24
  Bottom 0.813: v195.58,45.09 202.56,45.09 204.79,47.31 204.79,54.93 207.01,57.15 231.4,57.15 M2.P$4
OUT4C  (via drill 0.7)
  Top 0.813: v193.04,38.73 U$6.19
  Bottom 0.813: M3.P$4 233.57,22.75 234.95,24.13 234.95,36.2 232.41,38.73 v193.04,38.73
OUT4D  (via drill 0.7)
  Top 0.813: v80.01,33.02 81.28,34.29 160.34,34.29 164.78,38.73 U$6.10
  Bottom 0.813: v80.01,33.02 49.53,33.02 48.26,31.75 48.26,24.13 49.64,22.75 M4.P$4
PANEL_BACKLIGHT  (via drill 0.7)
  Top 0.406: U$1.17 104.44,98.08 102.87,96.52 v102.87,93.34
  Top 0.813: Q1.1 56.83,82.87 v57.15,82.55
  Bottom 0.813: v57.15,82.55 57.15,91.44 59.69,93.98 101.6,93.98 102.23,93.98 v102.87,93.34
REAR_DOORS_OPEN  (via drill 0.7)
  Top 0.406: U$1.21 107.03,98.07 107.95,97.16 v107.95,93.34
  Top 0.813: LED17.A 157.57,41.5 158.43,40.64 v158.43,39.69
  Bottom 0.813: v158.43,39.69 158.43,28.26 156.53,26.35 111.44,26.35 107.95,29.84 v107.95,93.34
REAR_FOG_LIGHT  (via drill 0.7)
  Top 0.254: U$1.3 107.69,109.91 v109.22,111.44
  Top 0.813: LED12.A 68.61,14 v67.31,13.97
  Bottom 0.813: v67.31,13.97 64.77,11.43 41.91,11.43 39.37,13.97 39.37,26.67 41.27,28.57 41.27,106.05 54.61,119.38 106.36,119.38 109.22,116.52 v109.22,111.44
RESET  (via drill 0.7)
  Top 0.406: U1.29 178.62,59.35 178.59,59.32
  Top 0.813: S2.3 S2.4 182.45,122.56 173.51,122.56 166.05,115.09 v166.05,109.22 | v162.56,60.96 164.2,59.32 C6.2 178.59,59.32 R6.1
  Bottom 0.813: v162.56,60.96 156.84,66.67 113.82,66.67 111.92,68.58 111.92,91.76 114.94,94.77 137.16,94.77 | 137.16,94.77 160.34,94.77 166.05,100.49 v166.05,109.22 | ICSP.5 137.16,94.77
RIGHT_SIGNAL  (via drill 0.7)
  Top 0.406: v207.96,76.2 207.96,91.12 209.55,92.71 209.55,101.6 205.47,105.67 U$2.3
  Top 0.813: LED19.A 237.05,74.49 v238.76,76.2
  Bottom 0.813: v238.76,76.2 v207.96,76.2
RXD  (via drill 0.7)
  Top 0.406: U1.30 179.42,63.15 180.34,62.23 v180.34,60.96
  Top 0.813: v93.98,69.85 v115.57,69.85 | v162.56,114.3 167.64,119.38 JP1.3
  Top 1.016: v62.23,87.63 63.02,88.42 63.02,93.98 60.01,97 JP2.1
  Bottom 0.813: v93.98,69.85 92.71,71.12 92.71,80.01 85.09,87.63 v62.23,87.63 | v115.57,69.85 178.44,69.85 180.34,67.94 v180.34,60.96 | v162.56,114.3 143.51,114.3 134.62,105.41 62.23,105.41 60,103.18 JP2.1
S0  (via drill 0.7)
  Top 0.406: U$1.10 103.14,106.42 103.5,106.05 v142.88,106.05 | v161.29,106.05 195.58,106.05 199.23,109.7 200.5,109.7 200.93,109.27 U$2.10 | U1.12 178.62,79.19 178.44,79.38
  Top 0.813: v161.29,81.92 175.9,81.92 178.44,79.38 | v154.94,81.92 154.94,104.78 156.21,106.05 v161.29,106.05
  Bottom 0.813: v142.88,106.05 v161.29,106.05 | v161.29,81.92 v154.94,81.92
S1  (via drill 0.7)
  Top 0.406: U$1.11 102.48,105.8 103.5,104.78 v145.41,104.78 | v158.75,104.78 198.75,104.78 200.28,106.3 U$2.11 | U1.13 177.82,78.08 177.48,78.42
  Top 0.813: v158.75,104.78 157.48,104.78 156.84,104.14 156.84,81.28 158.12,80.01 175.9,80.01 177.48,78.42
  Bottom 0.813: v145.41,104.78 v158.75,104.78
S2  (via drill 0.7)
  Top 0.406: U$1.14 102.48,101.53 103.19,102.23 v145.41,102.23 | v158.75,102.23 195.74,102.23 198.91,99.06 199.87,99.06 200.28,99.47 U$2.14 | U1.14 177.02,76.98 176.53,77.47
  Top 0.813: v152.4,78.11 175.9,78.11 176.53,77.47 | v145.41,78.11 v145.41,102.23
  Bottom 0.813: v145.41,102.23 v158.75,102.23 | v152.4,78.11 v145.41,78.11
S3  (via drill 0.7)
  Top 0.406: U$1.13 101.83,102.47 102.87,103.5 v142.88,103.5 | v161.29,103.5 198.75,103.5 199.62,102.64 U$2.13 | U1.15 176.22,75.24 175.9,75.56
  Top 0.813: v152.4,76.2 175.26,76.2 175.9,75.56 | v147.32,76.2 147.32,102.55 146.37,103.5 v142.88,103.5
  Bottom 0.813: v142.88,103.5 v161.29,103.5 | v152.4,76.2 v147.32,76.2 132.08,76.2 130.81,77.47 130.81,83.82 132.08,85.09 ICSP.4
SERVICE_WARNING  (via drill 0.7)
  Top 0.406: U$1.18 105.08,97.62 104.14,96.68 v104.14,95.89
  Top 0.813: LED14.A 126.22,17 128.27,19.05 v128.27,21.59
  Bottom 0.813: v128.27,21.59 110.49,21.59 104.14,27.94 v104.14,95.89
STOP_WARNING  (via drill 0.7)
  Top 0.406: U$1.20 106.39,97.61 106.68,97.31 v106.68,95.89
  Top 0.813: LED15.A 183.05,22.69 v182.88,22.86
  Bottom 0.813: v182.88,22.86 182.88,23.18 181.29,24.77 111.12,24.77 106.68,29.21 v106.68,95.89
TXD  (via drill 0.7)
  Top 0.406: U1.31 180.22,63.62 v181.61,62.23
  Bottom 0.813: v181.61,62.23 181.61,97.79 167.64,111.76 165.1,111.76 | 165.1,111.76 JP1.2 | JP2.2 62.54,101.91 63.5,102.87 135.89,102.87 144.78,111.76 165.1,111.76

## Text on the board
tPlace: ROBIT-01062013 | RXD | TXD | GND | 12V | Robot ve Otomasyon Teknolojileri / Donanim Ar-Ge Danismanlik / Taahhüt San. ve Tic. Ltd. Sti. | Tel : 0312 212 3802 / Faks: 0312 212 3902 / E-Posta: info@robit.com.tr | GND | RESET | MOSI | SCK | 5V | MISO | RIGHT_SIGNAL | OIL | LEFT_SIGNAL | GLOW_PLUG | BATTERY | X25 | X25 | ABS | ENGINE | FRONT_DOORS | HANDBRAKE | AIRBAG | REAR_DOORS | ESP/ESR | LOW_FUEL | CRUISE_CONTROL | X25 | X25 | FRONT_FOG | MAIN_BEAM | REAR_FOG | SERVICE | STOP | DIPPED_MAIN | IMMOBILISER | BRAKE_FLUID
bPlace: 5V | GND | LCD_TX | LCD_RX | DTR | RX | TX | VCC | CTS | GND | RESET | RXD | TXD | GND | 12V | Robot ve Otomasyon Teknolojileri / Donanim Ar-Ge Danismanlik / Taahhüt San. ve Tic. Ltd. Sti. | Tel : 0312 212 3802 / Faks: 0312 212 3902 / E-Posta: info@robit.com.tr